# Altium PCB mcuv2.PcbDoc (part 1 of 2)
Units mil, origin at the board's own origin, x right, y up, seen from the top; angles counter-clockwise.
Board outline 3149.61 x 3149.61 mil, 2 copper layers (Top Layer, Bottom Layer); 116 components, 121 nets, 455 pads, 59 vias.
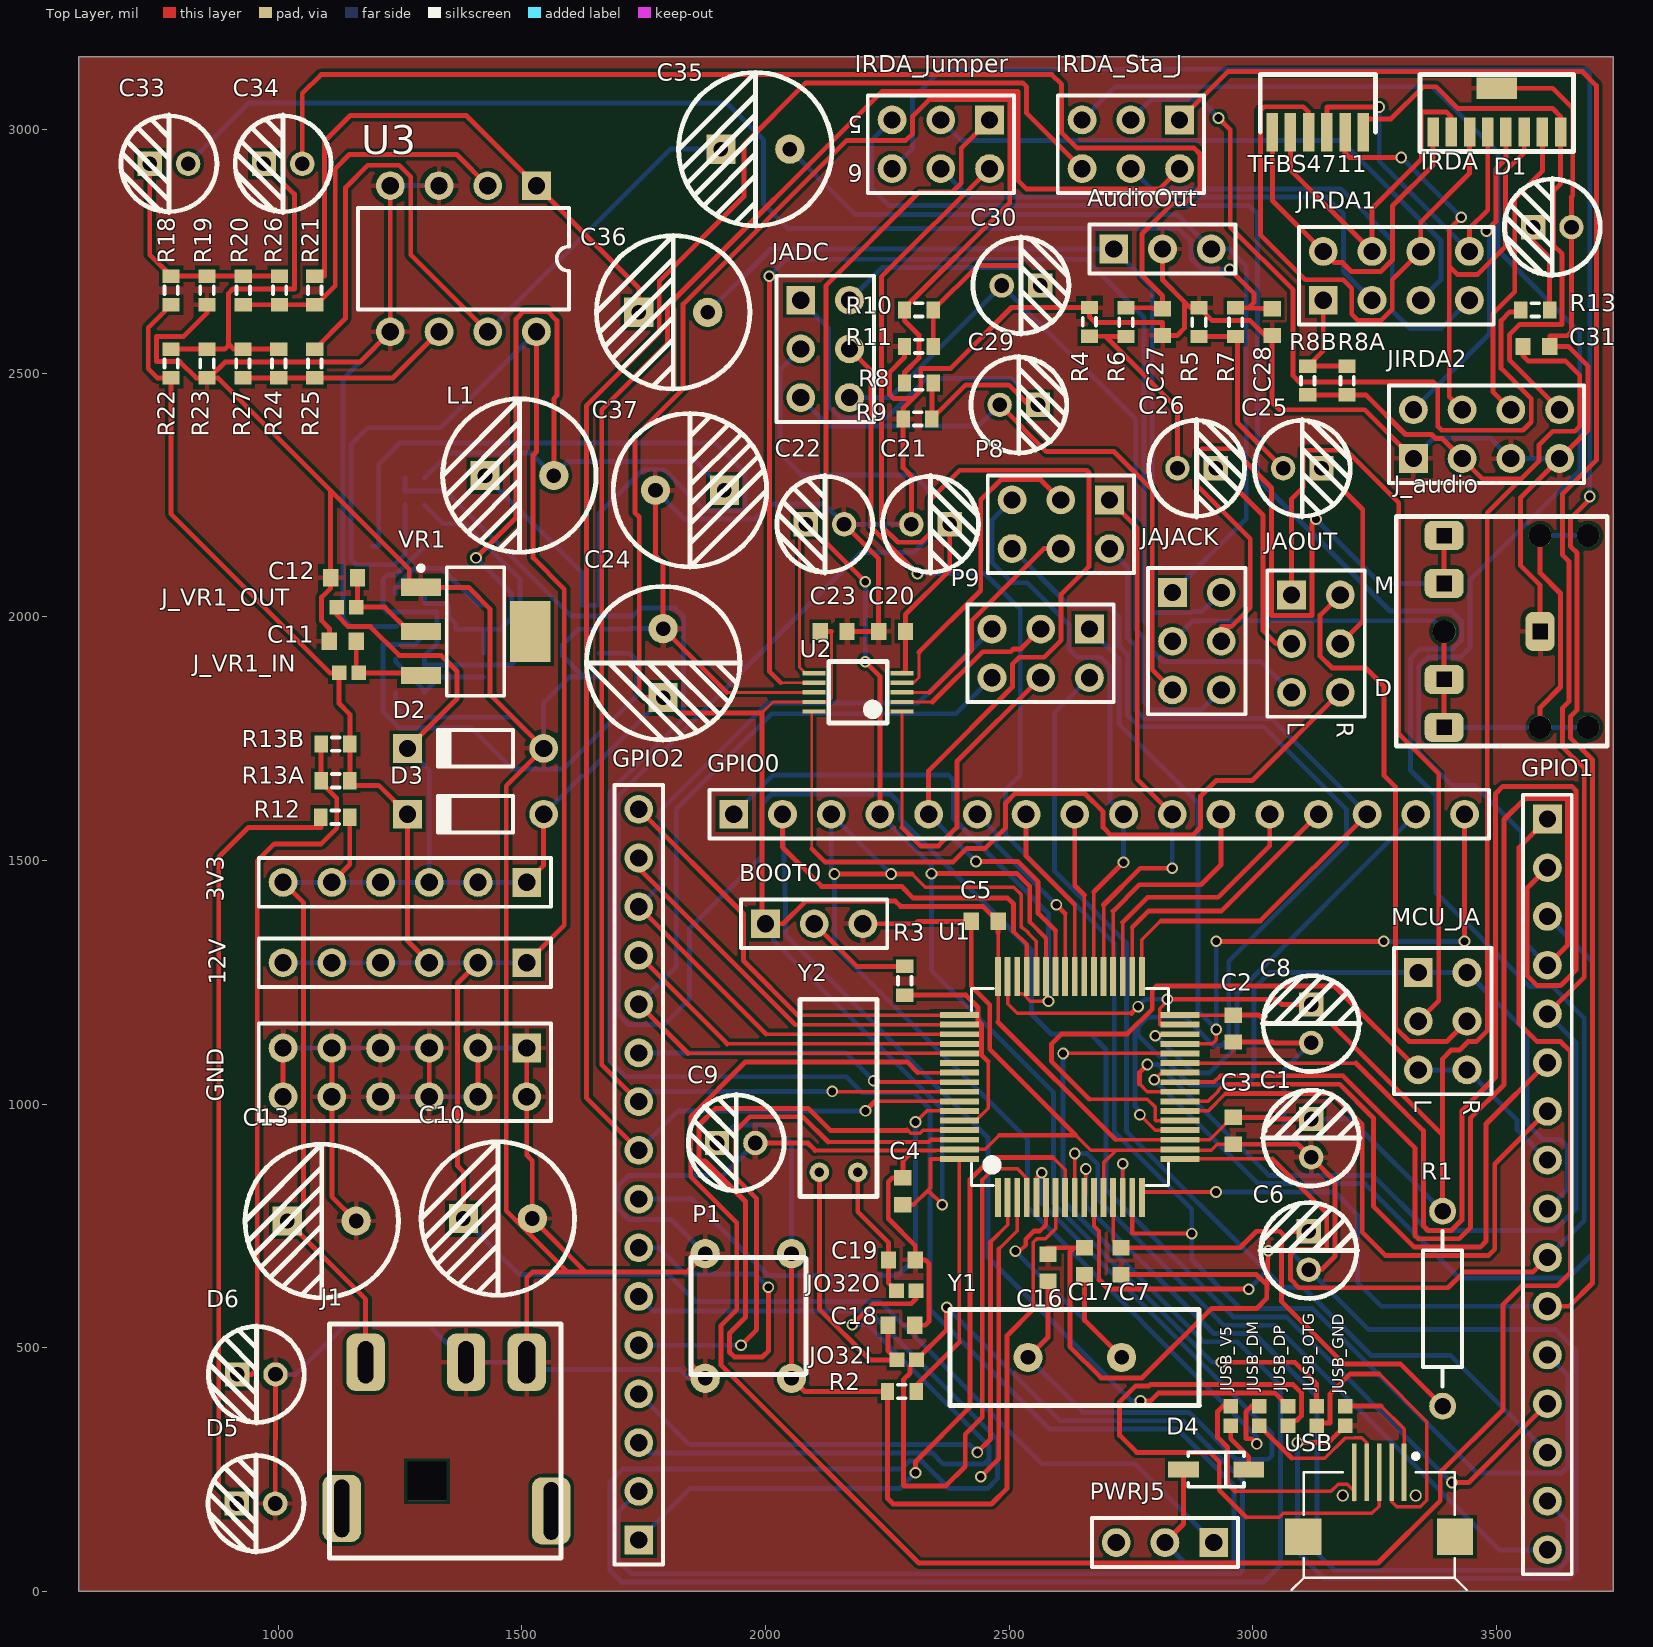
[diagram p0: Top Layer view]
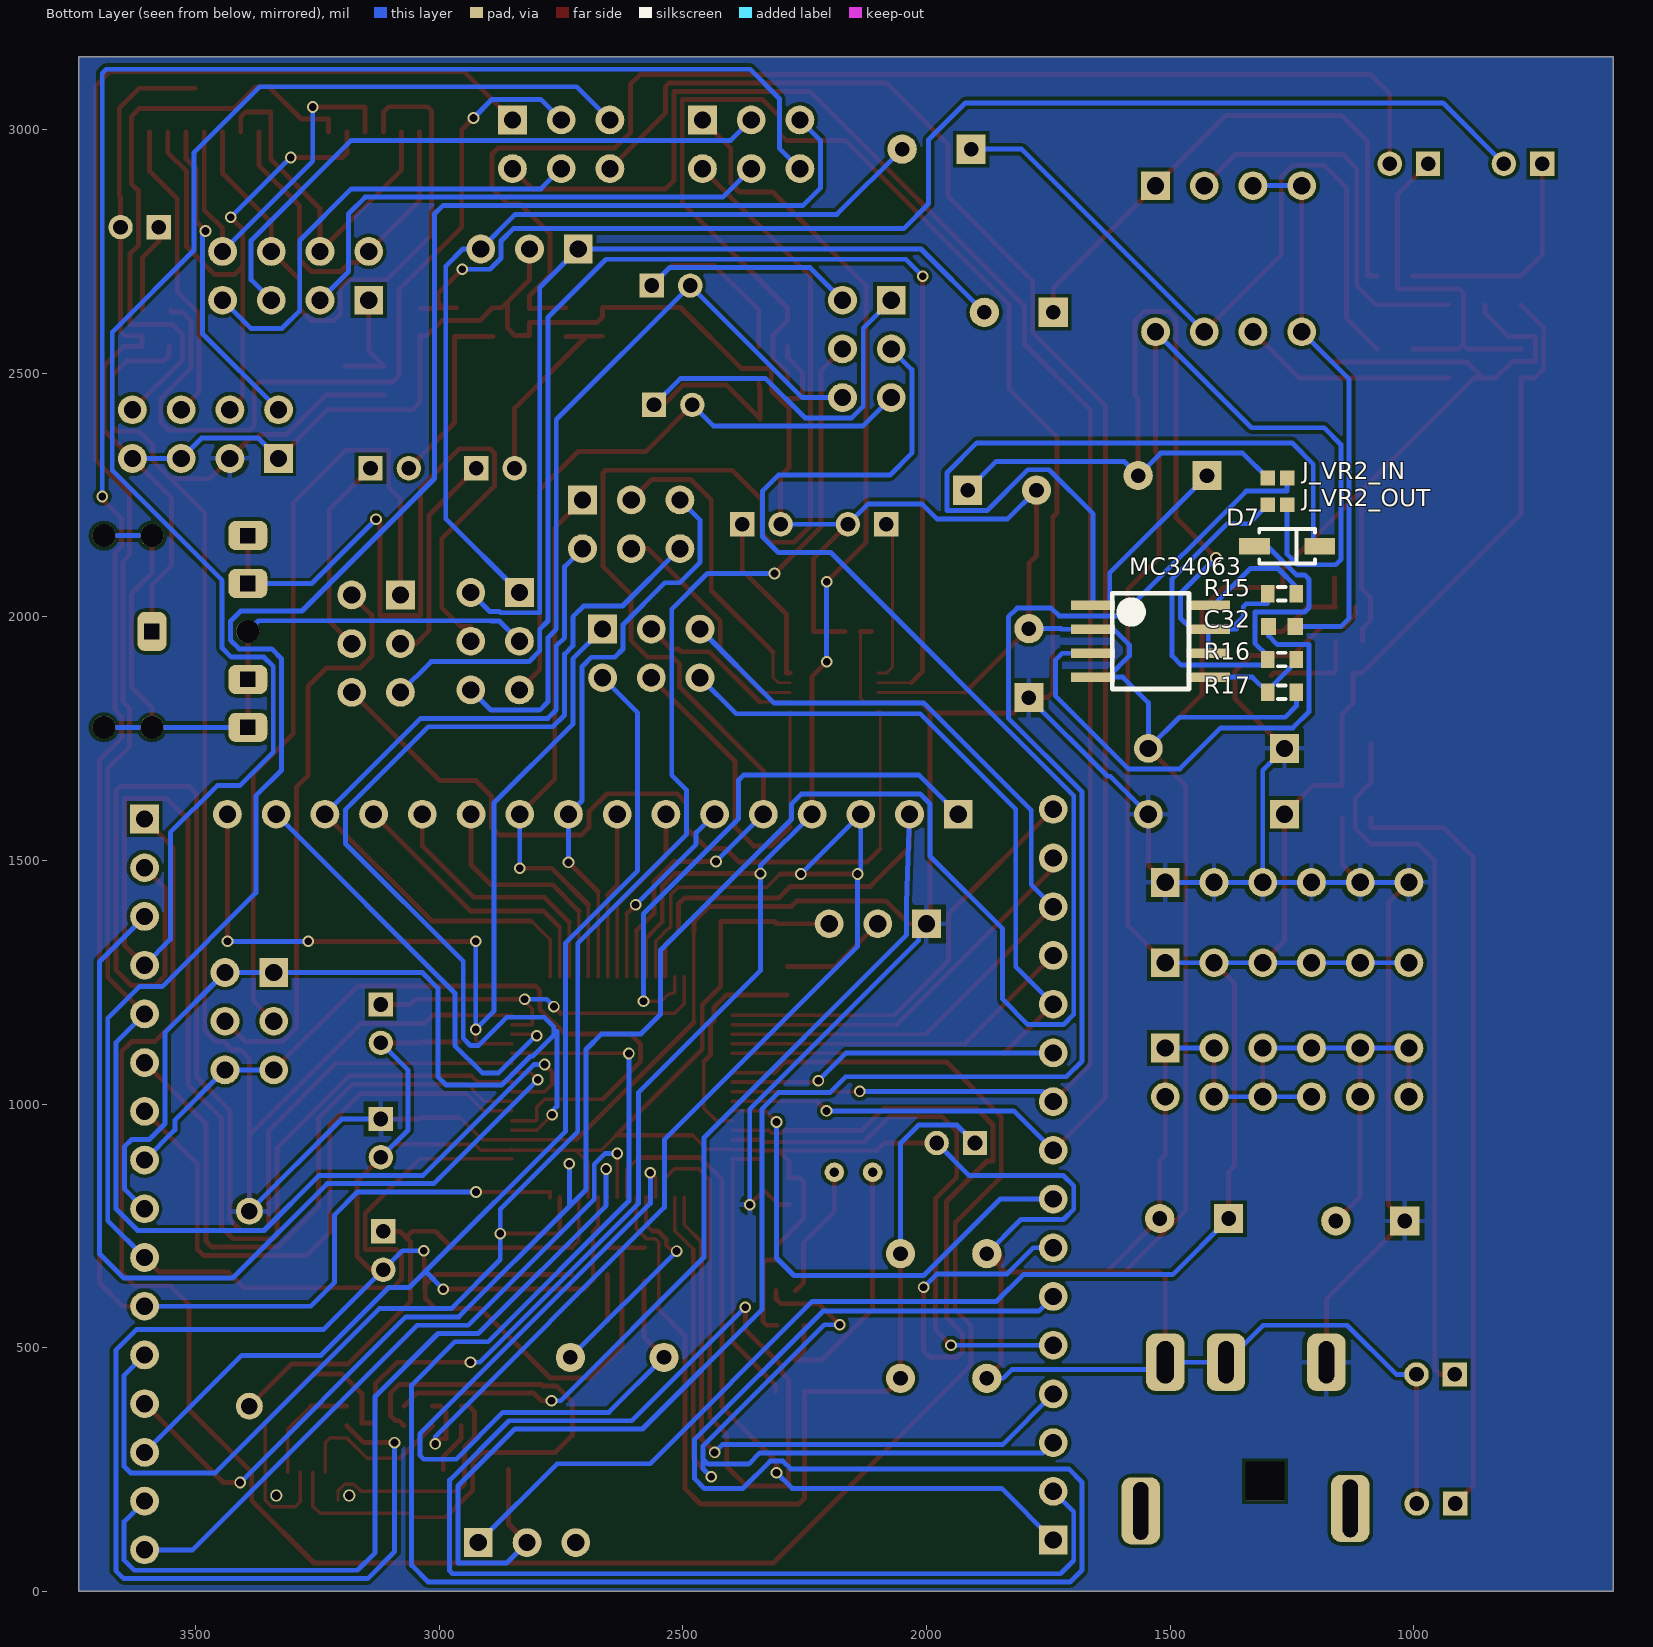
[diagram p1: Bottom Layer view, seen from below]

## Layer stack, top to bottom
Top Solder: solder mask 0.4, Solder Resist, Dk 3.5
Top Layer: signal copper 1.4
Dielectric 1: dielectric 12.6, FR-4, Dk 4.8
Bottom Layer: signal copper 1.4
Bottom Solder: solder mask 0.4, Solder Resist, Dk 3.5

## Board outline
590.55,0 590.55,3149.61 3740.16,3149.61 3740.16,0

## Design rules (kind name [scope] priority, off if disabled: settings)
Clearance [All] p1: gap=7 ignorepadtopadclearanceinfootprint=TRUE except(0: Arc-Hole Track-Hole SMDPad-Hole THPad-Hole Via-Hole Fill-Hole Poly-Hole Region-Hole Text-Text Text-Hole)
PolygonConnect [All] p1: connectstyle=Relief reliefconductorwidth=10 reliefentries=4 polygonreliefangle="90 Angle" airgapwidth=10
RoutingVias [All] p1: holewidth=16 width=24 viastyle="Through Hole" minholewidth=7.87 minwidth=17.72 maxholewidth=248.03 maxwidth=50
SMDNeckDown [All] p1: percent=70.000
SolderMaskExpansion [All] p1: expansion=4
Width [All] p1: maxlimit=12 minlimit=6 preferedwidth=10 minimp=50.000000 maximp=50.000000 favimp=50.000000
30 further rules are at their usual default settings.

## Classes and differential pairs
component class power: 3V3 12V C10 C11 C12 C13 C32 C37 D2 D3 D5 D6 D7 GND J1 J_VR1_IN J_VR1_OUT J_VR2_IN J_VR2_OUT L1 MC34063 PWRJ5 R12 R13A R13B R15 R16 R17 VR1
component class mcuCore: BOOT0 C1 C2 C3 C4 C5 C6 C7 C8 C9 C16 C17 C18 C19 D4 JO32I JO32O JUSB_DM JUSB_DP JUSB_GND JUSB_OTG JUSB_V5 P1 R1 R2 R3 U1 USB Y1 Y2
component class irda_copy: C31 D1 IRDA IRDA_Jumper IRDA_Sta_J JIRDA1 JIRDA2 R8A R8B R13 TFBS4711
component class GPIO: GPIO0 GPIO1 GPIO2
component class audio: AudioOut C20 C21 C22 C23 C24 C25 C26 C27 C28 C29 C30 C33 C34 C35 C36 J_audio JADC JAJACK JAOUT MCU_JA P8 P9 R4 R5 R6 R7 R8 R9 R10 R11 R18 R19 R20 R21 R22 R23 R24 R25 R26 R27 U2 U3

## Components (designator, comment, footprint, x,y, rotation, side; value= is the part's Value field where it differs from the comment)
3V3 "3V3" HDR1X6 1510,1455 r180 top
12V "12V" HDR1X6 1510,1290 r180 top
AudioOut "Header 3" HDR1X3 2715,2755 r0 top
BOOT0 "Header 3" HDR1X3 2000,1370 r0 top
C1 "Cap2" Cap5x10 3120,930 r270 top value=10uF
C2 "Cap" 1608[0603] 2960,1155 r90 top value=100nF
C3 "Cap" 1608[0603] 2960,945 r90 top value=100nF
C4 "Cap" 1608[0603] 2282,821 r270 top value=100nF
C5 "Cap" 1608[0603] 2450,1375 r0 top value=100nF
C6 "Cap2" Cap5x10 3115,699.37 r270 top value=10uF
C7 "Cap" 1608[0603] 2730,677.44 r90 top value=100nF
C8 "Cap2" Cap5x10 3120,1165 r270 top value=10uF
C9 "Cap2" Cap5x10 1940,920 r0 top value=10uF
C10 "Cap Pol1" Cap8*14 1450.7,765 r180 top value=470uF
C11 "Cap" 1608[0603] 1132.44,1950 r0 top value=100nF
C12 "Cap" 1608[0603] 1135,2080 r0 top value=100nF
C13 "Cap Pol1" Cap8*14 1089.3,760 r180 top value=470uF
C16 "Cap" 1608[0603] 2580,664 r270 top value=22pF
C17 "Cap" 1608[0603] 2655,677.44 r270 top value=22pF
C18 "Cap" 1608[0603] 2279,546 r180 top value=22pF
C19 "Cap" 1608[0603] 2280,680 r180 top value=22pF
C20 "Cap" 1608[0603] 2260,1970 r0 top value=100nF
C21 "Cap2" Cap5x10 2338.86,2190 r180 top value=10uF
C22 "Cap2" Cap5x10 2122,2190 r0 top value=10uF
C23 "Cap" 1608[0603] 2140,1970 r180 top value=100nF
C24 "Cap2" Cap8*14 1790,1905 r270 top value=470uF
C25 "Cap2" Cap5x10 3101.9,2305 r180 top value=10uF
C26 "Cap2" Cap5x10 2885.04,2305 r180 top value=10uF
C27 "Cap" 1608[0603] 2815,2605 r90 top value=22nF
C28 "Cap" 1608[0603] 3040,2605 r90 top value=22nF
C29 "Cap2" Cap5x10 2520,2435 r180 top value=10uF
C30 "Cap2" Cap5x10 2524.37,2680 r180 top value=10uF
C31 "Cap" 1608[0603] 3582.44,2555 r180 top value=100nF
C32 "Cap Semi" 1608[0603] 1270.47,1980 r0 bottom value=100pF
C33 "Cap Pol1" Cap5x10 775.63,2930 r0 top value=10uF
C34 "Cap Pol1" Cap5x10 1010,2930 r0 top value=10uF
C35 "Cap Pol1" Cap8*14 1979.3,2960 r180 top value=470uF
C36 "Cap Pol1" Cap8*14 1810.7,2625 r180 top value=470uF
C37 "Cap Pol1" Cap8*14 1845,2260 r0 top value=470uF
D1 "LED0" Cap5x10 3615,2800 r0 top
D2 "Diode 1N4148" DO-35 1405,1730 r180 top
D3 "Diode 1N4148" DO-35 1405,1595 r180 top
D4 "1N5819" 425 2925,250 r180 top
D5 "LED1" Cap5x10 954.37,180 r0 top
D6 "LED1" Cap5x10 955,445 r0 top
D7 "1N5819" 425 1260.08,2145 r0 bottom
GND "GND" HDR2X6 1510,1115 r180 top
GPIO0 "Header 16" HDR1X16 1935,1595 r0 top
GPIO1 "Header 16" HDR1X16 3605,1585 r270 top
GPIO2 "Header 16" HDR1X16 1740,105 r90 top
IRDA "HSDL3201" HSDL3201 3501.3,2995 r0 top
IRDA_Jumper "Header 3X2" HDR2X3 2460,3020 r180 top
IRDA_Sta_J "Header 3X2" HDR2X3 2850,3020 r180 top
J1 "PWR2.5" PCBComponent_1 1305.28,470 r180 top
J_audio "Phonejack Stereo SW" AudioJack_3F07 3727.8,1970 r90 top
J_VR1_IN "Res3" JUMPER2 1140,1885 r90 top value=0
J_VR1_OUT "Res3" JUMPER2 1145,2020 r270 top value=0
J_VR2_IN "Res3" JUMPER2 1285,2285 r90 bottom value=0
J_VR2_OUT "Res3" JUMPER2 1285,2230 r90 bottom value=0
JADC "Header 3X2" HDR2X3 2072.51,2650 r270 top
JAJACK "Header 3X2" HDR2X3 2835.55,2050 r270 top
JAOUT "Header 3X2" HDR2X3 3080,2045 r270 top
JIRDA1 "Header 4X2" HDR2X4 3145,2650 r0 top
JIRDA2 "Header 4X2" HDR2X4 3330,2325 r0 top
JO32I "Res3" JUMPER2 2295,475 r270 top value=0 (schematic designator J1_OSC32)
JO32O "Res3" JUMPER2 2294,617 r270 top value=0 (schematic designator J2_OSC32)
JUSB_DM "Res3" JUMPER2 3013.75,365 r0 top value=0
JUSB_DP "Res3" JUMPER2 3072.5,365 r0 top value=0
JUSB_GND "Res3" JUMPER2 3190,355 r180 top value=1K
JUSB_OTG "Res3" JUMPER2 3131.25,365 r0 top value=0
JUSB_V5 "Res3" JUMPER2 2955,355 r180 top value=1K
L1 "Inductor" Cap8*14 1495,2290 r180 top value=100uH
MC34063 "MC34063" MC34063 1540,1950 r270 bottom
MCU_JA "Header 3X2" HDR2X3 3340,1270 r270 top
P1 "Reset Button" DC_Jack 1965,565 r270 top
P8 "Header 3X2" HDR2X3 2706.23,2240 r180 top
P9 "Header 3X2" HDR2X3 2665,1975 r180 top
PWRJ5 "Header 3" HDR1X3 2920,100 r180 top
R1 "Res2" AXIAL-0.4 3390,580 r270 top value=10
R2 "Res2" J1-0603 2280,410 r0 top value=10K
R3 "Res2" J1-0603 2286,1253 r90 top value=100
R4 "R4" J1-0603 2665,2605.47 r270 top value=10K
R5 "Res2" J1-0603 2890,2605 r270 top value=10K
R6 "Res2" J1-0603 2740,2605 r90 top value=100
R7 "Res2" J1-0603 2965,2605 r90 top value=100
R8 "Res2" J1-0603 2315,2480 r0 top value=10K
R8A "Res2" J1-0603 3193.78,2485 r270 top value=100
R8B "Res2" J1-0603 3113.08,2485 r270 top value=100
R9 "Res2" J1-0603 2312.13,2406.22 r180 top value=10K
R10 "Res2" J1-0603 2315,2630 r0 top value=10K
R11 "Res2" J1-0603 2315,2555 r180 top value=10K
R12 "Res3" J1-0603 1117.13,1588.78 r180 top value=100
R13 "Res2" J1-0603 3580,2630 r0 top value=100
R13A "Res3" J1-0603 1117.6,1663.78 r180 top value=1K
R13B "Res3" J1-0603 1117.6,1738.78 r180 top value=1K
R15 "Res3" J1-0603 1270.47,2047.5 r0 bottom value=1K
R16 "Res3" J1-0603 1270.47,1912.5 r0 bottom value=10K
R17 "Res3" J1-0603 1270.47,1845 r0 bottom value=1K
R18 "Res2" J1-0603 780,2670 r270 top value=10K
R19 "Res2" J1-0603 853.86,2670 r90 top value=10K
R20 "Res2" J1-0603 928.29,2670 r90 top value=1K
R21 "Res2" J1-0603 1075,2670 r270 top value=1K
R22 "Res2" J1-0603 780,2520 r270 top value=10K
R23 "Res2" J1-0603 853.75,2520 r90 top value=10K
R24 "Res2" J1-0603 1001.25,2520 r90 top value=1K
R25 "Res2" J1-0603 1075,2520 r270 top value=1k
R26 "Res2" J1-0603 1002.72,2670 r90 top value=1K
R27 "Res2" J1-0603 927.5,2520 r90 top value=1K
TFBS4711 "TFBS4711" TFBS4711 3133.7,2995 r0 top
U1 "Part Number: stm32f4x5rg" LQFP64-10x10mm 2625,1035 r90 top value=Value
U2 "CS4344" CS4344 2190,1845 r180 top
U3 "NE5532P" P008 1380,2735 r180 top
USB "Header 5" Micro_USB 3259.8,27.3 r270 top
VR1 "Volt Reg" SOT223_L 1405,1970 r0 top
Y1 "XTAL" XTAL_8M 2635,480 r0 top
Y2 "XTAL" XTAL_32k 2150,860 r0 top

## Footprints (in the part's own frame and the unit in brackets; to place one, negate y for a bottom-side part, rotate by r counter-clockwise, add the part's x,y. Pads: shape width x height; smd on the part's side, far side on the other; paste and mask are expansions set on the pad)
425 [mm] "SOD-123; 2 Leads; Body 2.7 x 1.6 mm, (LxW)"
  rect 1.6x0.85 smd: 1(-1.7,0) 2(1.7,0)
  silkscreen extent -1.45,-0.9 1.45,0.9
1608[0603] [mm] "Chip Capacitor, Body 1.6x0.8mm, IPC High Density"
  rect 0.8x0.9 smd: 1(-0.7,0) 2(0.7,0)
  body extent -0.87,-0.48 0.87,0.48, height 1.3
AudioJack_3F07 [mm]
  round 1.2 hole 1.2: 0(-5,1) 0(-5,3.5) 0(0,8.5) 0(5,1) 0(5,3.5)
  rrect50% 2.032x1.524 hole 0.787 square: 1(0,3.5)
  rrect50% 1.524x2.032 hole 0.787 square: 2(-5,8.5) 3(-2.5,8.5) 4(2.5,8.5) 5(5,8.5)
  silkscreen extent -5.97,0 6,11
AXIAL-0.4 [mm] "Axial Device, Thru-Hole; 2 Leads; 0.4 in Pin Spacing"
  round 1.4 hole 0.85: 1(-5.08,0) 2(5.08,0)
  silkscreen extent -4.06,-1.02 4.06,1.02
Cap5x10 [mil]
  rect 50x50 hole 30: 1(-39.37,0)
  round 50 hole 30: 2(39.37,0)
  silkscreen extent -98,-100 98,100
Cap8*14 [mil]
  rect 60x60 hole 30: 1(70.7,0)
  round 60 hole 30: 2(-70.7,0)
  silkscreen extent -157,-157 157,157
CS4344 [mm]
  rect 1.2x0.225 smd: 1(-2.286,1) 2(-2.286,0.5) 3(-2.286,0) 4(-2.286,-0.5) 5(-2.286,-1) 6(2.286,-1) 7(2.286,-0.5) 8(2.286,0) 9(2.286,0.5) 10(2.286,1)
  silkscreen extent -1.52,-1.6 1.52,1.6
DC_Jack [mil]
  round 60 hole 30: 1(-127.95,88.58) 2(127.95,88.58) 3(127.95,-88.58) 4(-127.95,-88.58)
  Top Layer lines w10: -113.11,-118.11 -117,-118.11 -120,-118.11
  silkscreen extent -120,-118 120,118
DO-35 [mm] "Diode, Axial; Body 3.8 x 1.9 mm (LxDia. max), Lead Dia. 0.53 mm (max)"
  round 1.5 hole 0.9: 1(-3.55,0)
  rect 1.5x1.5 hole 0.9: 2(3.55,0)
  silkscreen extent -1.95,-0.95 2.05,0.95
HDR1X3 [mm] "Connector; Header; 3 Position"
  rect 1.5x1.5 hole 0.9: 1(0,0)
  round 1.5 hole 0.9: 2(2.54,0) 3(5.08,0)
  silkscreen extent -1.27,-1.27 6.35,1.27
HDR1X6 [mm] "Connector; Header; 6 Position"
  rect 1.5x1.5 hole 0.9: 1(0,0)
  round 1.5 hole 0.9: 2(2.54,0) 3(5.08,0) 4(7.62,0) 5(10.16,0) 6(12.7,0)
  silkscreen extent -1.27,-1.27 13.97,1.27
HDR1X16 [mm] "Connector; Header; 16 Position"
  rect 1.5x1.5 hole 0.9: 1(0,0)
  round 1.5 hole 0.9: 2(2.54,0) 3(5.08,0) 4(7.62,0) 5(10.16,0) 6(12.7,0) 7(15.24,0) 8(17.78,0) 9(20.32,0) 10(22.86,0) 11(25.4,0) 12(27.94,0) 13(30.48,0) 14(33.02,0) 15(35.56,0) 16(38.1,0)
  silkscreen extent -1.27,-1.27 39.37,1.27
HDR2X3 [mm] "Connector; Header; 3x2 Position"
  rect 1.5x1.5 hole 0.9: 1(0,0)
  round 1.5 hole 0.9: 2(0,2.54) 3(2.54,0) 4(2.54,2.54) 5(5.08,0) 6(5.08,2.54)
  silkscreen extent -1.27,-1.27 6.35,3.81
HDR2X4 [mm] "Connector; Header; 4x2 Position"
  rect 1.5x1.5 hole 0.9: 1(0,0)
  round 1.5 hole 0.9: 2(0,2.54) 3(2.54,0) 4(2.54,2.54) 5(5.08,0) 6(5.08,2.54) 7(7.62,0) 8(7.62,2.54)
  silkscreen extent -1.27,-1.27 8.89,3.81
HDR2X6 [mm] "Connector; Header; 6x2 Position"
  rect 1.5x1.5 hole 0.9: 1(0,0)
  round 1.5 hole 0.9: 2(0,2.54) 3(2.54,0) 4(2.54,2.54) 5(5.08,0) 6(5.08,2.54) 7(7.62,0) 8(7.62,2.54) 9(10.16,0) 10(10.16,2.54) 11(12.7,0) 12(12.7,2.54)
  silkscreen extent -1.27,-1.27 13.97,3.81
HSDL3201 [mm]
  rect 0.6x1.5 smd: 1(3.325,0) 2(2.375,0) 3(1.425,0) 4(0.475,0) 5(-0.475,0) 6(-1.425,0) 7(-2.375,0) 8(-3.325,0)
  rect 2.1x1.1 smd: 9(0,2.286)
  silkscreen extent -4,-1.02 4,3
J1-0603 [mm] "Chip Resistor, Body 1.6x0.8mm, IPC High Density"
  rect 0.7x0.9 smd: 1(-0.75,0) 2(0.75,0)
  silkscreen extent -0.2,-0.35 0.2,0.35, body extent -0.85,-0.48 0.85,0.48, height 0.9
JUMPER2 [mil]
  rect 30x30 smd: 1(0,15) 2(0,-25)
LQFP64-10x10mm [mil]
  rect 80x12 smd: 1(-226.38,147.64) 2(-226.38,127.95) 3(-226.38,108.27) 4(-226.38,88.58) 5(-226.38,68.9) 6(-226.38,49.21) 7(-226.38,29.53) 8(-226.38,9.84) 9(-226.38,-9.84) 10(-226.38,-29.53) 11(-226.38,-49.21) 12(-226.38,-68.9) 13(-226.38,-88.58) 14(-226.38,-108.27) 15(-226.38,-127.95) 16(-226.38,-147.64) 33(226.38,-147.64) 34(226.38,-127.95) 35(226.38,-108.27) 36(226.38,-88.58) 37(226.38,-68.9) 38(226.38,-49.21) 39(226.38,-29.53) 40(226.38,-9.84) 41(226.38,9.84) 42(226.38,29.53) 43(226.38,49.21) 44(226.38,68.9) 45(226.38,88.58) 46(226.38,108.27) 47(226.38,127.95) 48(226.38,147.64)
  rect 12x80 smd: 17(-147.64,-226.38) 18(-127.95,-226.38) 19(-108.27,-226.38) 20(-88.58,-226.38) 21(-68.9,-226.38) 22(-49.21,-226.38) 23(-29.53,-226.38) 24(-9.84,-226.38) 25(9.84,-226.38) 26(29.53,-226.38) 27(49.21,-226.38) 28(68.9,-226.38) 29(88.58,-226.38) 30(108.27,-226.38) 31(127.95,-226.38) 32(147.64,-226.38) 49(147.64,226.38) 50(127.95,226.38) 51(108.27,226.38) 52(88.58,226.38) 53(68.9,226.38) 54(49.21,226.38) 55(29.53,226.38) 56(9.84,226.38) 57(-9.84,226.38) 58(-29.53,226.38) 59(-49.21,226.38) 60(-68.9,226.38) 61(-88.58,226.38) 62(-108.27,226.38) 63(-127.95,226.38) 64(-147.64,226.38)
  silkscreen extent -202,-202 202,202, body extent 0,0 10,10, height 10
MC34063 [mm]
  rect 0.49x2.286 smd: 1(-1.875,-3) 2(-0.625,-3) 3(0.625,-3) 4(1.875,-3) 5(1.875,3) 6(0.625,3) 7(-0.625,3) 8(-1.875,3)
  silkscreen extent -2.5,-2 2.5,2
Micro_USB [mm]
  rect 3x0.25 smd: 1(-5.508,1.3) 2(-5.508,0.65) 3(-5.508,0) 4(-5.508,-0.65) 5(-5.508,-1.3)
  round 0.635 hole 0.457 unplated: MH1(-4.3,1.9) MH2(-4.3,-1.9)
  rect 1.9x1.9 smd: ""(-2.15,3.95) ""(-2.15,-3.95)
  silkscreen extent -6.47,-4.57 0.63,4.57
P008 [mm] "DIP; 8 Leads; Row Spacing 7.62 mm; Pitch 2.54 mm"
  rect 1.5x1.5 hole 0.9: 1(-3.81,-3.81)
  round 1.5 hole 0.9: 2(-1.27,-3.81) 3(1.27,-3.81) 4(3.81,-3.81) 5(3.81,3.81) 6(1.27,3.81) 7(-1.27,3.81) 8(-3.81,3.81)
  silkscreen extent -5.5,-2.65 5.5,2.65
PCBComponent_1 [mm]
  rrect50% 2x3 hole 0.9 slot 2.2 at 90 deg unplated: 1(-5.2,0)
  rrect50% 2x3 hole 0.8 slot 2.2 at 90 deg unplated: 2(-2.032,0) 3(3.2,0)
  rrect50% 2x3.5 hole 0.8 slot 3 at 90 deg unplated: 4(-6.477,7.747) 5(4.445,7.62)
  rect 2x2 hole 2 square: 6(0,6.2)
  Top Layer pour cut-out: -2.413,8.763
  silkscreen extent -6.99,-2 5.08,10.2
SOT223_L [mm] "SOT223, 4-Leads, Body 6.5x3.5mm, Pitch 2.3mm, Lead Span 7mm, IPC High Density"
  rect 2.1x0.9 smd: 1(-2.85,2.3) 2(-2.85,0) 3(-2.85,-2.3)
  rect 2.1x3.2 smd: 4(2.85,0)
  silkscreen extent -2.97,-3.35 1.5,3.42, body extent -1.85,-3.35 1.85,3.35, height 1.7
TFBS4711 [mm]
  rect 0.6x2 smd: 1(-2.37,0) 2(-1.425,0) 3(-0.475,0) 4(0.475,0) 5(1.425,0) 6(2.375,0)
  silkscreen extent -3,0 3,3
XTAL_8M [mil]
  round 60 hole 30: 1(-96.06,0) 2(96.06,0)
  silkscreen extent -256,-98 256,98
XTAL_32k [mil]
  round 40 hole 20: 1(-39.37,0) 2(39.37,0)
  silkscreen extent -79,-50 79,355

## Part data
3V3 12V: library part "Header 6", "Header, 6-Pin", LatestRevisionDate=17-Jul-2002, LatestRevisionNote="Re-released for DXP Platform.", Publisher="Altium Limited"
AudioOut BOOT0 PWRJ5: "Header, 3-Pin", LatestRevisionDate=17-Jul-2002, LatestRevisionNote="Re-released for DXP Platform.", Publisher="Altium Limited"
C1 C2 C3 C4 C5 C6 C7 C8 C9 C11 C12 C16 C17 C18 C19 C20 C21 C22 C23 C24 C25 C26 C27 C28 C29 C30 C31: "Capacitor", Publisher="Altium Limited"
  C1 C6 C8 C9 C21 C22 C24 C25 C26 C29 C30: PackageDescription="Capacitor; 2 Leads", PackageReference=CAPR5-4X5, Published=23-Sep-2002
  C2 C3 C4 C5 C7 C11 C12 C16 C17 C18 C19 C20 C23 C27 C28 C31: LatestRevisionDate=17-Jul-2002, LatestRevisionNote="Re-released for DXP Platform.", PackageDescription="Radial Cap, Thru-Hole; 2 Leads; 0.3 in Pin Spacing", PackageReference=RAD-0.3, Published=8-Jun-2000
C10 C13 C33 C34 C35 C36 C37: "Polarized Capacitor (Radial)", LatestRevisionDate=17-Jul-2002, LatestRevisionNote="Re-released for DXP Platform.", PackageDescription="Polarized Capacitor (Radial); 2 Leads", PackageReference=RB7.6-15, Published=8-Jun-2000, Publisher="Altium Limited"
C32: "Capacitor (Semiconductor SIM Model)", LatestRevisionDate=29-May-2009, LatestRevisionNote="IPC-7351 Footprint Added.", PackageDescription="Chip Capacitor", PackageReference=C1206, Published=8-Jun-2000, Publisher="Altium Limited"
D1: "Typical INFRARED GaAs LED", LatestRevisionDate=08-Jul-2005, LatestRevisionNote="Mech Layer 1 removed.", PackageDescription="LED; 2 Leads", PackageReference=LED-0, Published=8-Jun-2000, Publisher="Altium Limited"
D2 D3: "High Conductance Fast Diode", Code_JEDEC=DO-204-AH, ComponentLink1Description="Manufacturer Link", ComponentLink1URL=http://www.fairchildsemi.com/, ComponentLink2Description=Datasheet, ComponentLink2URL=http://www.fairchildsemi.com/ds/1N%2F1N4148.pdf, DatasheetVersion=1997, LatestRevisionDate=17-Jul-2002, LatestRevisionNote="Re-released for DXP Platform.", PackageDescription="Diode, Axial; Body 3.8 x 1.9 mm (LxDia. max), Lead Dia. 0.53 mm (max)", PackageReference=DO-35, Published=8-Jun-2000, Publisher="Altium Limited"
D4 D7: library part "Diode 1N4148", "High Conductance Fast Diode", Code_JEDEC=DO-204-AH, ComponentLink1Description="Manufacturer Link", ComponentLink1URL=http://www.fairchildsemi.com/, ComponentLink2Description=Datasheet, ComponentLink2URL=http://www.fairchildsemi.com/ds/1N%2F1N4148.pdf, DatasheetVersion=1997, LatestRevisionDate=17-Jul-2002, LatestRevisionNote="Re-released for DXP Platform.", PackageDescription="Diode, Axial; Body 3.8 x 1.9 mm (LxDia. max), Lead Dia. 0.53 mm (max)", PackageReference=DO-35, Published=8-Jun-2000, Publisher="Altium Limited"
D5 D6: "Typical RED GaAs LED", LatestRevisionDate=08-Jul-2005, LatestRevisionNote="Mech Layer 1 removed.", PackageDescription="LED; 2 Leads", PackageReference=LED-1, Published=8-Jun-2000, Publisher="Altium Limited"
GND: library part "Header 6X2", "Header, 6-Pin, Dual row", LatestRevisionDate=17-Jul-2002, LatestRevisionNote="Re-released for DXP Platform.", Publisher="Altium Limited"
GPIO0 GPIO1 GPIO2: "Header, 16-Pin", LatestRevisionDate=17-Jul-2002, LatestRevisionNote="Re-released for DXP Platform.", Publisher="Altium Limited"
IRDA_Jumper IRDA_Sta_J JADC JAJACK JAOUT MCU_JA P8 P9: "Header, 3-Pin, Dual row", LatestRevisionDate=17-Jul-2002, LatestRevisionNote="Re-released for DXP Platform.", Publisher="Altium Limited"
J1: "Low Voltage Power Supply Connector", ComponentLink1Description="Manufacturer Link", ComponentLink1URL=http://domino.kycon.com/internet/Products.html, DatasheetDocument=09-May-2002, Published=17-Dec-2003, Publisher="Altium Limited"
J_audio: "3-Conductor Jack with 2 break contacts (normals) and 2 auxiliary make contacts", ComponentLink1Description="Manufacturer Link", ComponentLink1URL=http://domino.kycon.com/internet/Products.html, DatasheetDocument=07-Mar-2000, LatestRevisionDate=17-Dec-2003, LatestRevisionNote="PCB Footprint replaced.", Published=5-Jan-2004, Publisher="Altium Limited"
J_VR1_IN J_VR1_OUT J_VR2_IN J_VR2_OUT JO32I JO32O JUSB_DM JUSB_DP JUSB_GND JUSB_OTG JUSB_V5 R1 R2 R3 R5 R6 R7 R8 R8A R8B R9 R10 R11 R12 R13 R13A R13B R15 R16 R17 R18 R19 R20 R21 R22 R23 R24 R25 R26 R27: "Resistor", Published=8-Jun-2000, Publisher="Altium Limited"
  J_VR1_IN J_VR1_OUT J_VR2_IN J_VR2_OUT JO32I JO32O JUSB_DM JUSB_DP JUSB_GND JUSB_OTG JUSB_V5 R12 R13A R13B R15 R16 R17: LatestRevisionDate=29-May-2009, LatestRevisionNote="IPC-7351 Footprint Added.", PackageDescription="Chip Resistor", PackageReference=J1-0603
  R1 R2 R3 R5 R6 R7 R8 R8A R8B R9 R10 R11 R13 R18 R19 R20 R21 R22 R23 R24 R25 R26 R27: LatestRevisionDate=17-Jul-2002, LatestRevisionNote="Re-released for DXP Platform.", PackageDescription="Axial Device, Thru-Hole; 2 Leads; 0.4 in Pin Spacing", PackageReference=AXIAL-0.4
JIRDA1 JIRDA2: "Header, 4-Pin, Dual row", LatestRevisionDate=17-Jul-2002, LatestRevisionNote="Re-released for DXP Platform.", Publisher="Altium Limited"
P1: library part "Header 2X2", "Header, 2-Pin, Dual row", LatestRevisionDate=17-Jul-2002, LatestRevisionNote="Re-released for DXP Platform.", Publisher="Altium Limited"
R4: library part Res2, "Resistor", LatestRevisionDate=17-Jul-2002, LatestRevisionNote="Re-released for DXP Platform.", PackageDescription="Axial Device, Thru-Hole; 2 Leads; 0.4 in Pin Spacing", PackageReference=AXIAL-0.4, Published=8-Jun-2000, Publisher="Altium Limited"
U1: library part STM32F4x5RG, "No Description Available", Manufacturer_Part_Number=stm32f4x5rg, Copyright="Copyright (C) 2016 Accelerated Designs. All rights reserved", RefDes=RefDes, Type=DEV, Vendor=STMicroelectronics
U3: "Dual Low-Noise Operational Amplifier", Code_JEDEC=MO-001-AN, ComponentLink1Description="Manufacturer Link", ComponentLink1URL=http://www.ti.com/, ComponentLink2Description=Datasheet, ComponentLink2URL=http://www-s.ti.com/sc/ds/ne5532a.pdf, DatasheetVersion=May-1988, LatestRevisionDate=04-Mar-2005, LatestRevisionNote="Stylized 3D Model Added.", PackageDescription="DIP; 8 Leads; Row Spacing 7.62 mm; Pitch 2.54 mm", PackageReference=P008, PackageVersion=Jun-1999, Published=15-Apr-2002, Publisher="Altium Limited"
USB: "Header, 5-Pin", LatestRevisionDate=17-Jul-2002, LatestRevisionNote="Re-released for DXP Platform.", Publisher="Altium Limited"
VR1: "Voltage Regulator", LatestRevisionDate=29-May-2009, LatestRevisionNote="IPC-7351 Footprint Added.", PackageDescription="3-Pin Transistor Outline Package 2.54 mm Pitch, 15.1 mm Lead Span", PackageReference=D2PAK, Published=24-Mar-1999, Publisher="Altium Limited"
Y1 Y2: "Crystal Oscillator", LatestRevisionDate=17-Jul-2002, LatestRevisionNote="Re-released for DXP Platform.", PackageDescription="Crystal, Thru-Hole; 2 Leads; Body 3.1 x 8.2 mm (Dia.xH)", PackageReference=R38, Published=8-Jun-2000, Publisher="Altium Limited"
L1: Code_IEC=1005, Code_JEITA=0402, LatestRevisionDate=29-May-2009, LatestRevisionNote="IPC-7351 Footprint Added.", PackageDescription="Chip Inductor", PackageReference=0402-A, Published=8-Jun-2000, Publisher="Altium Limited"

## Via types
v1: diameter 24, hole 16, Top Layer to Bottom Layer, 59 vias

## Nets (pads, with @x,y where several pads share a name; then routed paths per layer and width w, separated by ;. In a path a pad name is that pad's centre, name@x,y a point inside that pad or via, vN(x,y) a via of type N, cw(c..) or ccw(c..) an arc to the next point about the centre after c; other vN are vias at no path point)
+5: D4.2 J_VR2_IN.2 PWRJ5.2 | length 4059.8
  Top Layer w10: PWRJ5.2@2820,100 2858.07,138.07 D4.2@2858.07,250
  Bottom Layer w10: J_VR2_IN.2@1260,2285 1260,2258 1344,2258 1600,2002 1728,2002 1744,2018 1814,2018 1832,2000 1832,1792 1681,1641 1681,1088 1713,1056 2166,1056 2198,1024 2303,1024 2338,989 2338,578 2583,333 2845,333 2962,216 2962,58 2862,58 PWRJ5.2@2820,100
+12: 12V.1 12V.2 12V.3 12V.4 12V.5 12V.6 C10.1 D3.2 J_VR1_IN.1 J_VR2_OUT.2 PWRJ5.1 R13A.1 R13B.1 R18.2 R22.2 U3.8 | length 6827.2
  Top Layer w10: R18.2@780,2640.47 733.28,2593.75 733.28,2509.19 752,2490.47 R22.2@780,2490.47 780,2211 1106,1885 J_VR1_IN.1@1125,1885 1125,1822.13 1147.13,1800 R13B.1@1147.13,1738.78 R13A.1@1147.13,1663.78 1147.13,1654.17 1206.07,1654.17 D3.2@1265.24,1595 1265.24,1334.76 12V.3@1310,1290 ; C10.1@1380,765 1380,861 1368,873 1368,1248 12V.2@1410,1290 ; 12V.1@1510,1290 1587,1367 1587,2057 1523,2121 1523,2332 1530,2339 U3.8@1530,2585
  Bottom Layer w10: 12V.6@1010,1290 12V.5@1110,1290 12V.4@1210,1290 12V.3@1310,1290 12V.2@1410,1290 12V.1@1510,1290 ; J_VR2_OUT.2@1260,2230 1260,2128.79 1238.21,2107 1160,2107 1149.66,2117.34 1149.66,2353.66 1184,2388 1333,2388 U3.8@1530,2585 ; C10.1@1380,765 1495,650 1801.37,650 1856.42,594.95 2234.32,594.95 2567.46,261.81 2758.19,261.81 PWRJ5.1@2920,100
AampL: C27.2 C34.2 R6.2 | length 2603.1
  Top Layer w10: C34.2@1049.37,2930 1049.37,3074.37 1088,3113 2588,3113 2608,3093 2608,2994 2640,2962 2880,2962 2892,2950 2892,2880 2860,2848 2835,2848 2773,2786 2773,2701 2815,2659 C27.2@2815,2632.56 2796.44,2632.56 2794.47,2634.53 R6.2@2740,2634.53
AampR: C28.2 C33.2 R7.2 | length 2635
  Top Layer w10: v1(2953,2713.47) 3002.97,2663.5 3002.97,2645.5 2992,2634.53 R7.2@2965,2634.53 3016,2632.56 C28.2@3040,2632.56
  Bottom Layer w10: C33.2@815,2930 940,3055 1920,3055 1996,2979 1996,2848 2047,2797 2848,2797 2873.47,2771.53 2873.47,2736 2896,2713.47 v1(2953,2713.47)
AIN1: C29.2 JADC.5 JAJACK.5 | length 1263.7
  Top Layer w10: C29.2@2480.63,2435 2576.63,2339 2715.49,2339 2794,2260.49 2794,1891.55 JAJACK.5@2835.55,1850
  Bottom Layer w10: JADC.5@2072.51,2450 2131.04,2391.47 2437.1,2391.47 C29.2@2480.63,2435
AIN1_ADC: GPIO1.13 JADC.3 U1.14 | length 5305.4
  Top Layer w7.2: U1.14@2733.27,808.62 v1(2733.27,877.66)
  Top Layer w10: v1(3409,223) 3443,223 GPIO1.13@3605,385
  Bottom Layer w10: JADC.3@2072.51,2550 2030,2507.49 2030,2336 2075,2291 2304,2291 2337,2258 2337,2165 2304,2132 2197,2132 1698,1633 1698,1184 1719,1163 1792,1163 1844,1215 1844,1360 1993,1509 1993,1616 2013.53,1636.53 2256.47,1636.53 2277,1616 2277,1585 2546.1,1315.9 2546.1,1184 2586.2,1143.9 2667,1143.9 2699,1111.9 2699,824 2733.27,789.73 ; v1(2733.27,877.66) 2733.27,789.73 ; v1(3409,223) 3069,563 2960,563 2733.27,789.73
AIN1_BIAS: C29.1 JADC.1 R8.2 R9.1 | length 1074.3
  Top Layer w10: R8.2@2344.53,2480 2341.65,2464.41 R9.1@2341.65,2406.22 2411.43,2476 2499,2476 2540,2435 C29.1@2559.37,2435
  Bottom Layer w10: JADC.1@2072.51,2650 2130,2592.51 2130,2432 2153.53,2408.47 2249.47,2408.47 2330,2489 2505.37,2489 C29.1@2559.37,2435
AIN2: C30.2 JADC.6 JAJACK.6 | length 1566
  Bottom Layer w10: JADC.6@2172.51,2450 2255,2450 C30.2@2485,2680 2760.02,2404.98 2760.02,1974.47 2777,1957.49 2777,1825.47 2794,1808.47 2894.02,1808.47 JAJACK.6@2935.55,1850
AIN2_ADC: GPIO1.12 JADC.4 U1.15 | length 3667.6
  Top Layer w8.4: U1.15@2752.95,808.62 2752.95,734 v1(2875,734)
  Top Layer w10: JADC.4@2172.51,2550 2217,2505.51 2217,2183.96 v1(2311.96,2089)
  Bottom Layer w10: v1(2311.96,2089) 2450,2089 2523,2016 2523,1675 2493,1645 2493,1553 2716,1330 2716,943 2875,784 v1(2875,734) 2875,681 2976,580 3123.06,580 3460.06,243 3634,243 3647,256 3647,443 GPIO1.12@3605,485
AIN2_BIAS: C30.1 JADC.2 R10.2 R11.1 | length 783.2
  Top Layer w10: R11.1@2344.53,2555 R10.2@2344.53,2630 2435.53,2721 2522.74,2721 C30.1@2563.74,2680
  Bottom Layer w10: JADC.2@2172.51,2650 2239.51,2717 2526.74,2717 C30.1@2563.74,2680
AOUTL: AudioOut.1 C36.2 JAJACK.2 | length 1825.4
  Bottom Layer w10: C36.2@1881.4,2625 2011.4,2755 AudioOut.1@2715,2755 2794.02,2675.98 2794.02,2008.47 2874.47,2008.47 2877,2011 2896.55,2011 JAJACK.2@2935.55,2050
AOUTL_B: C26.1 JAOUT.3 | length 443.2
  Top Layer w10: C26.1@2924.41,2305 3021.47,2207.93 3021.47,1971.53 3048,1945 JAOUT.3@3080,1945
AOUTR: AudioOut.3 C35.2 JAJACK.1 | length 1769.1
  Bottom Layer w10: C35.2@2050,2960 2184,2826 2844,2826 AudioOut.3@2915,2755 2952,2755 2987,2720 2987,2201.45 JAJACK.1@2835.55,2050
AOUTR_B: C25.1 JAOUT.4 | length 414.2
  Top Layer w10: C25.1@3141.27,2305 3226,2220.27 3226,1991 JAOUT.4@3180,1945
BOOT0: R3.1 U1.60 | length 445.6
  Top Layer w7.2: U1.60@2398.62,966.1 2432,966.1 2457.12,991.23 2457.12,1087.14
  Top Layer w10: R3.1@2286,1223.47 2411.53,1223.47 2436.38,1198.62 2436.38,1171.72 2443.36,1164.74 2443.36,1100.9 2457.12,1087.14
DAC_AOUTL: JAOUT.5 U2.7 | length 2758.7
  Top Layer w6: 2031.32,1864.68 U2.7@2100,1864.68
  Top Layer w10: v1(2008,2699) 2008,1888 2031.32,1864.68
  Bottom Layer w10: v1(2008,2699) 2043,2734 2658,2734 2777.02,2614.98 2777.02,1991.47 2794,1974.49 2794,1930 2816,1908 3017,1908 JAOUT.5@3080,1845
DAC_AOUTR: JAOUT.6 U2.10 | length 1683.5
  Top Layer w5.32: U2.10@2095,1805.63 U2.10@2100,1805.63
  Top Layer w6: 2095,1524 U2.10@2095,1805.63
  Top Layer w10: 2095,1524 2122,1497 2385.34,1497 2413.21,1524.87 2450.87,1524.87 2493,1567 2493,1618 2512,1637 2656,1637 2693,1600 2693,1568 2709,1552 2877,1552 2893,1568 2893,1632 2925,1664 2999,1664 JAOUT.6@3180,1845
DAC_CK: P9.3 U2.2 | length 347
  Top Layer w6: U2.2@2280,1825.31 2342.98,1825.31
  Top Layer w10: 2342.98,1825.31 2445.98,1928.31 2503.5,1928.31 2509.19,1934 2524,1934 P9.3@2565,1975
DAC_MCK: P8.3 U2.4 | length 655.5
  Top Layer w6: U2.4@2280,1864.68 2304,1864.68 2315,1875.68 2315,1927
  Top Layer w10: 2315,1927 2442,2054 2442,2240 2484,2282 2564.23,2282 P8.3@2606.23,2240
DAC_OUT1: GPIO1.9 MCU_JA.1 MCU_JA.2 P8.6 U1.20 | length 3627.2
  Top Layer w7.2: v1(2768.54,977.88) 2800,946.42 U1.20@2851.38,946.42
  Bottom Layer w10: P8.6@2506.23,2140 2624.02,2022.21 2704,2022.21 2726.02,2000.19 2726.02,1940.47 2743,1923.49 2743,1798.45 2766.98,1774.47 3022.53,1774.47 3193,1604 3193,1534.71 2951,1292.71 2951,1135 2936,1120 2920,1120 2862.62,1177.38 2784.93,1178.08 2765.26,1158.41 2765.26,1140.8 2808.06,1098 2812.98,1098 2871.98,1039 2986,1039 3003,1056 3003,1238 3035,1270 MCU_JA.1@3340,1270 MCU_JA.2@3440,1270 3563,1147 3563,960 3596,927 3632,927 3646.53,912.47 3646.53,826.53 GPIO1.9@3605,785 ; 2758.85,1149.39 2758.85,995.15 2768.54,985.46 v1(2768.54,977.88)
DAC_OUT2: GPIO1.8 MCU_JA.5 MCU_JA.6 U1.21 | length 1615.1
  Top Layer w7.2: 2665,1010 2784,1010 2800,994 2800,967.1 2801,966.1 U1.21@2851.38,966.1
  Top Layer w10: 2665,1010 2587,1088 2587,1123 2608,1144 2742.94,1144 2793.85,1194.91 2793.85,1233.47 2802.38,1242 3168,1242 MCU_JA.5@3340,1070
  Bottom Layer w10: MCU_JA.5@3340,1070 MCU_JA.6@3440,1070 3542.94,967.06 3542.94,947.06 GPIO1.8@3605,885
DAC_SD: P9.4 U2.1 | length 760.4
  Top Layer w6: 2280,1568 U2.1@2280,1805.63
  Top Layer w10: 2280,1568 2318,1530 2355,1530 2393,1568 2393,1703 P9.4@2565,1875
DAC_WS: P8.4 U2.3 | length 484
  Top Layer w6.2: U2.3@2280,1845 2337,1845
  Top Layer w10: 2337,1845 2423.47,1931.47 2423.47,1992.2 2571.27,2140 P8.4@2606.23,2140
GND: AudioOut.2 BOOT0.3 C1.2 C2.1 C3.1 C4.1 C5.1 C6.2 C7.1 C8.2 C9.2 C10.2 C11.1 C12.1 C13.2 C16.1 C17.1 C18.1 C19.1 C20.1 C21.2 C22.2 C23.1 C24.2 C27.1 C28.1 C31.1 C32.1 C37.2 D1.2 D2.1 D5.2 D6.2 GND.1 GND.2 GND.3 GND.4 GND.5 GND.6 GND.7 GND.8 GND.9 GND.10 GND.11 GND.12 IRDA.9 J1.1 J1.2 J_audio.1 JIRDA2.1 JIRDA2.5 JIRDA2.7 JUSB_GND.1 MC34063.2 MC34063.4 P1.3 P1.4 R4.1 R5.1 R9.2 R11.2 R17.1 R19.1 R23.1 U1.12 U1.18 U1.63 U2.8 U3.3 U3.4 U3.5 VR1.1 | length 21728.1
  Top Layer w6: 1846.89,685 1846.89,692.95 P1.4@1876.42,692.95 ; 1920.7,1845 U2.8@2100,1845
  Top Layer w7.2: U1.63@2398.62,907.05 2450.95,907.05 2479.9,936 ; 2637.03,936 2667.67,905.36 2720.13,905.36 ; U1.12@2693.9,808.62 2693.9,879.13 2720.13,905.36 ; C3.1@2960,917.44 2927.27,917.44 2915.19,905.36 2851.38,905.36 2720.13,905.36
  Top Layer w8.4: 2102,905 2304,905 2348.85,905 U1.63@2398.62,907.05 ; U1.18@2851.38,905.36 U1.18@2851.38,907.05
  Top Layer w10: R19.1@853.86,2640.47 854,2640.47 854,2624 805.31,2575.31 750.28,2575.31 750.28,2523.75 798.25,2523.75 831.53,2490.47 R23.1@853.75,2490.47 R23.1@858.53,2490.47 ; D5.2@993.74,180 993.74,312 994.37,312.63 D6.2@994.37,445 ; GND.12@1010,1015 GND.11@1010,1115 ; C11.1@1104.88,1950 1104.88,1976.12 1089,1992 1089,2040.56 1107.44,2059 C12.1@1107.44,2080 1107.44,2259.03 ; GND.9@1110,1115 GND.10@1110,1015 1110,810 C13.2@1160,760 ; U3.4@1230,2885 U3.5@1230,2585 1168,2523 891.06,2523 R23.1@858.53,2490.47 ; GND.6@1310,1015 GND.5@1310,1115 ; GND.4@1410,1015 GND.3@1410,1115 ; J1.1@1510,470 1510,643.6 1521.4,655 1594,655 ; GND.1@1510,1115 GND.2@1510,1015 1510,895.4 1521.4,884 C10.2@1521.4,765 1631.4,655 ; C37.2@1774.3,2260 1774.3,2125.7 1790,2110 C24.2@1790,1975.7 1920.7,1845 ; 1846.89,678.11 1846.89,663.42 ; P1.3@1876.42,437.05 1846.89,466.58 1846.89,663.42 ; P1.4@1876.42,692.95 1846.89,663.42 ; C9.2@1979.37,920 2087,920 2102,905 ; C22.2@2161.37,2190 2232.44,2118.93 C20.1@2232.44,1970 C23.1@2167.56,1970 ; BOOT0.3@2200,1370 2308,1370 2313,1375 C5.1@2422.44,1375 2422.44,1241.68 2460.36,1203.76 2460.36,1112.67 2637.03,936 2479.9,936 ; R11.2@2285.47,2555 2285.47,2532.47 2255,2502 2255,2456.6 2263.6,2448 2302.75,2448 ; C21.2@2299.49,2190 2299.49,2289 2282.6,2305.89 R9.2@2282.6,2406.22 2282.6,2427.85 2302.75,2448 ; 2304,905 2282,883 C4.1@2282,848.56 2260.56,848.56 2252,840 2252,765 2307.56,709.44 C19.1@2307.56,680 2328,680 2336,672 2336,554 2328,546 C18.1@2306.56,546 ; C16.1@2578.31,705 2634,705 ; C17.1@2655,705 2634,705 ; C7.1@2730,649.88 3008,649.88 3029,628.88 3029,601 ; AudioOut.2@2815,2755 2815,2691.53 2860,2646.53 ; C3.1@2960,917.44 3093.19,917.44 C1.2@3120,890.63 3169,841.63 3169,687.58 3141.42,660 C6.2@3115,660 ; C2.1@2960,1127.44 3040.81,1127.44 3042.62,1125.63 C8.2@3120,1125.63 ; v1(3032,699) 3029,601 ; v1(3092,305) 3155,305 JUSB_GND.1@3190,340 ; JIRDA2.1@3330,2325 3230,2425 3055,2425 3040,2440 C28.1@3040,2577.44 3025.56,2577.44 2995,2608 2917.47,2608 2890.94,2634.53 R5.1@2890,2634.53 2872,2634.53 2860,2646.53 ; IRDA.9@3501.3,3085 3616,3085 3657,3044 3657,2864.63 3654.37,2862 D1.2@3654.37,2800 3654.37,2585.34 3646.03,2577 3610,2577 C31.1@3610,2555 3648,2555 3688.53,2514.47 3688.53,2383.53 JIRDA2.7@3630,2325 3550,2245 3550,2105 3590,2065 J_audio.1@3590,1970 ; R23.1@858.53,2490.47 876,2490.47 1107.44,2259.03 ; 1107.44,2259.03 1269,2097.47 1269,2060.55 VR1.1@1292.8,2060.55 1390.45,2060.55 1435,2016 1435,1839.76 D2.1@1544.76,1730 1468,1653.24 1468,781 1594,655 ; 1594,655 1631.4,655 ; 1631.4,655 1838.47,655 1846.89,663.42 ; 2302.75,2448 2318.75,2464 2318.75,2510 2380,2510 2505,2635 R4.1@2665,2635 2665,2616 2677,2604 2815,2604 C27.1@2815,2577.44 2845,2577.44 2860,2592.44 2860,2646.53 ; 2634,705 2625,696 2625,502 2689,438 2773,438 2915,580 3008,580 3029,601
  Bottom Layer w10: D6.2@994.37,445 1036,445 1137,546 1309.28,546 J1.2@1385.28,470 J1.1@1510,470 1510,455 1825,455 1842.95,437.05 P1.3@1876.42,437.05 ; GND.11@1010,1115 GND.9@1110,1115 GND.7@1210,1115 GND.5@1310,1115 ; GND.8@1210,1015 GND.6@1310,1015 GND.4@1410,1015 ; U3.5@1230,2585 1132.66,2487.66 1132.66,1997.34 1150,1980 C32.1@1242.91,1980 ; U3.4@1230,2885 U3.3@1330,2885 ; R17.1@1240.94,1845 1240.94,1817.06 1264,1794 1480.76,1794 D2.1@1544.76,1730 1544.76,1824 1596.95,1876.18 MC34063.4@1627.64,1876.18 ; GND.3@1410,1115 GND.1@1510,1115 ; MC34063.4@1658.11,1876.18 MC34063.4@1627.64,1876.18 ; C37.2@1774.3,2260 1833.3,2201 1979,2201 2010,2232 2119.37,2232 C22.2@2161.37,2190 C21.2@2299.49,2190 ; C24.2@1790,1975.7 1724.09,1975.7 1723,1974.61 MC34063.2@1658.11,1974.61 1616,1974.61 1583.82,1942.42 1583.82,1920 MC34063.4@1627.64,1876.18 ; P1.4@1876.42,692.95 1806.37,763 1719,763 1698,784 1698,832 1719,853 1912.37,853 C9.2@1979.37,920 ; v1(3032,699) 3076,699 C6.2@3115,660 3238,537 3622,537 3664,495 3664,42 3648,26 3147,26 3092,81 v1(3092,305) ; C1.2@3120,890.63 3064,946.63 3064,1069.63 C8.2@3120,1125.63 ; JIRDA2.1@3330,2325 3372,2367 3488,2367 JIRDA2.5@3530,2325 JIRDA2.7@3630,2325
I2S2_CK: GPIO0.16 P9.1 U1.29 | length 1980.1
  Top Layer w7.2: U1.29@2851.38,1123.58 2917.47,1123.58 2925.38,1131.49 v1(2925.38,1153.15)
  Top Layer w10: v1(2925.38,1334) v1(3269,1334) ; v1(3435,1334) GPIO0.16@3435,1595
  Bottom Layer w10: P9.1@2665,1975 2726,1914 2726,1779.9 2888,1617.9 2888,1190.53 v1(2925.38,1153.15) v1(2925.38,1334) ; v1(3269,1334) v1(3435,1334)
I2S2_MCK: GPIO0.10 P8.1 U1.37 | length 1128.9
  Top Layer w7.2: U1.37@2693.9,1261.38 2693.9,1408.55
  Top Layer w10: 2693.9,1408.55 2769.35,1484 v1(2835,1484) ; P8.1@2706.23,2240 2763.24,2182.99 2763.24,1666.76 GPIO0.10@2835,1595
  Bottom Layer w10: v1(2835,1484) GPIO0.10@2835,1595
I2S2_SD: GPIO1.14 P9.2 U1.11 | length 2699.7
  Top Layer w8.4: U1.11@2674.21,808.62 2674.21,750 2685,739.21 2685,639
  Top Layer w10: 2685,639 2704,620 v1(2992,620)
  Bottom Layer w10: P9.2@2665,1875 2593,1803 2593,1479 2741,1331 2741,944 3028.5,656.5 ; v1(2992,620) 3028.5,656.5 ; GPIO1.14@3605,285 3405.85,484.15 3242.95,484.15 3103.73,623.37 3061.63,623.37 3028.5,656.5
I2S2_WS: GPIO0.14 P8.2 U1.33 | length 1561.8
  Top Layer w7.2: U1.33@2772.64,1261.38 2772.64,1336.88 2811.75,1376
  Top Layer w10: 2811.75,1376 3016,1376 GPIO0.14@3235,1595
  Bottom Layer w10: P8.2@2706.23,2140 2743.02,2103.21 2743.02,1957.47 2760,1940.49 2760,1808.77 2777.3,1791.47 3038.53,1791.47 GPIO0.14@3235,1595
I2S3_CK: GPIO2.14 P9.5 U1.51 | length 1817.9
  Top Layer w7.2: 2001.73,1143.27 U1.51@2398.62,1143.27
  Top Layer w10: GPIO2.14@1740,1405 2001.73,1143.27
  Bottom Layer w10: GPIO2.14@1740,1405 1785,1450 1785,1603.28 2004.72,1823 2313,1823 P9.5@2465,1975
I2S3_MCK: GPIO0.9 P8.5 U1.38 | length 1178.8
  Top Layer w7.2: U1.38@2674.21,1261.38 2674.21,1435.21
  Top Layer w10: 2674.21,1435.21 v1(2735,1496)
  Bottom Layer w10: P8.5@2506.23,2240 2464.7,2198.47 2464.7,2112 2506.83,2069.88 2537.12,2069.88 2623,1984 2623,1934 2640,1917 2688,1917 2707,1898 2707,1623 GPIO0.9@2735,1595 v1(2735,1496)
I2S3_SD: GPIO2.12 P9.6 U1.53 | length 1892.2
  Top Layer w7.2: 1841.1,1103.9 U1.53@2398.62,1103.9
  Top Layer w10: GPIO2.12@1740,1205 1841.1,1103.9
  Bottom Layer w10: GPIO2.12@1740,1205 1817,1282 1817,1605 2013,1801 2391,1801 P9.6@2465,1875
IRDA_RXD: IRDA_Jumper.3 JIRDA1.5 | length 1268.7
  Bottom Layer w10: IRDA_Jumper.3@2360,3020 2402,2978 3180.92,2978 3386.53,2772.4 3386.53,2691.53 JIRDA1.5@3345,2650
IRDA_SD: IRDA_Sta_J.4 JIRDA1.7 | length 939.2
  Bottom Layer w10: IRDA_Sta_J.4@2750,2920 2791.53,2878.47 3180.53,2878.47 3286.53,2772.47 3286.53,2628.47 3323,2592 3387,2592 JIRDA1.7@3445,2650